# Altium PCB PCB_proj_module_1_1.PcbDoc (part 9 of 9)
Units mm, origin at the board's own origin, x right, y up, seen from the top; angles counter-clockwise.
Board outline 413 x 280 mm, 4 copper layers (Top Layer, Signal Layer 1, Signal Layer 2, Bottom Layer), stack 0.778 mm thick; 1054 components, 639 nets, 3181 pads, 673 vias.
Unrouted connection lines stored in the file: 570.
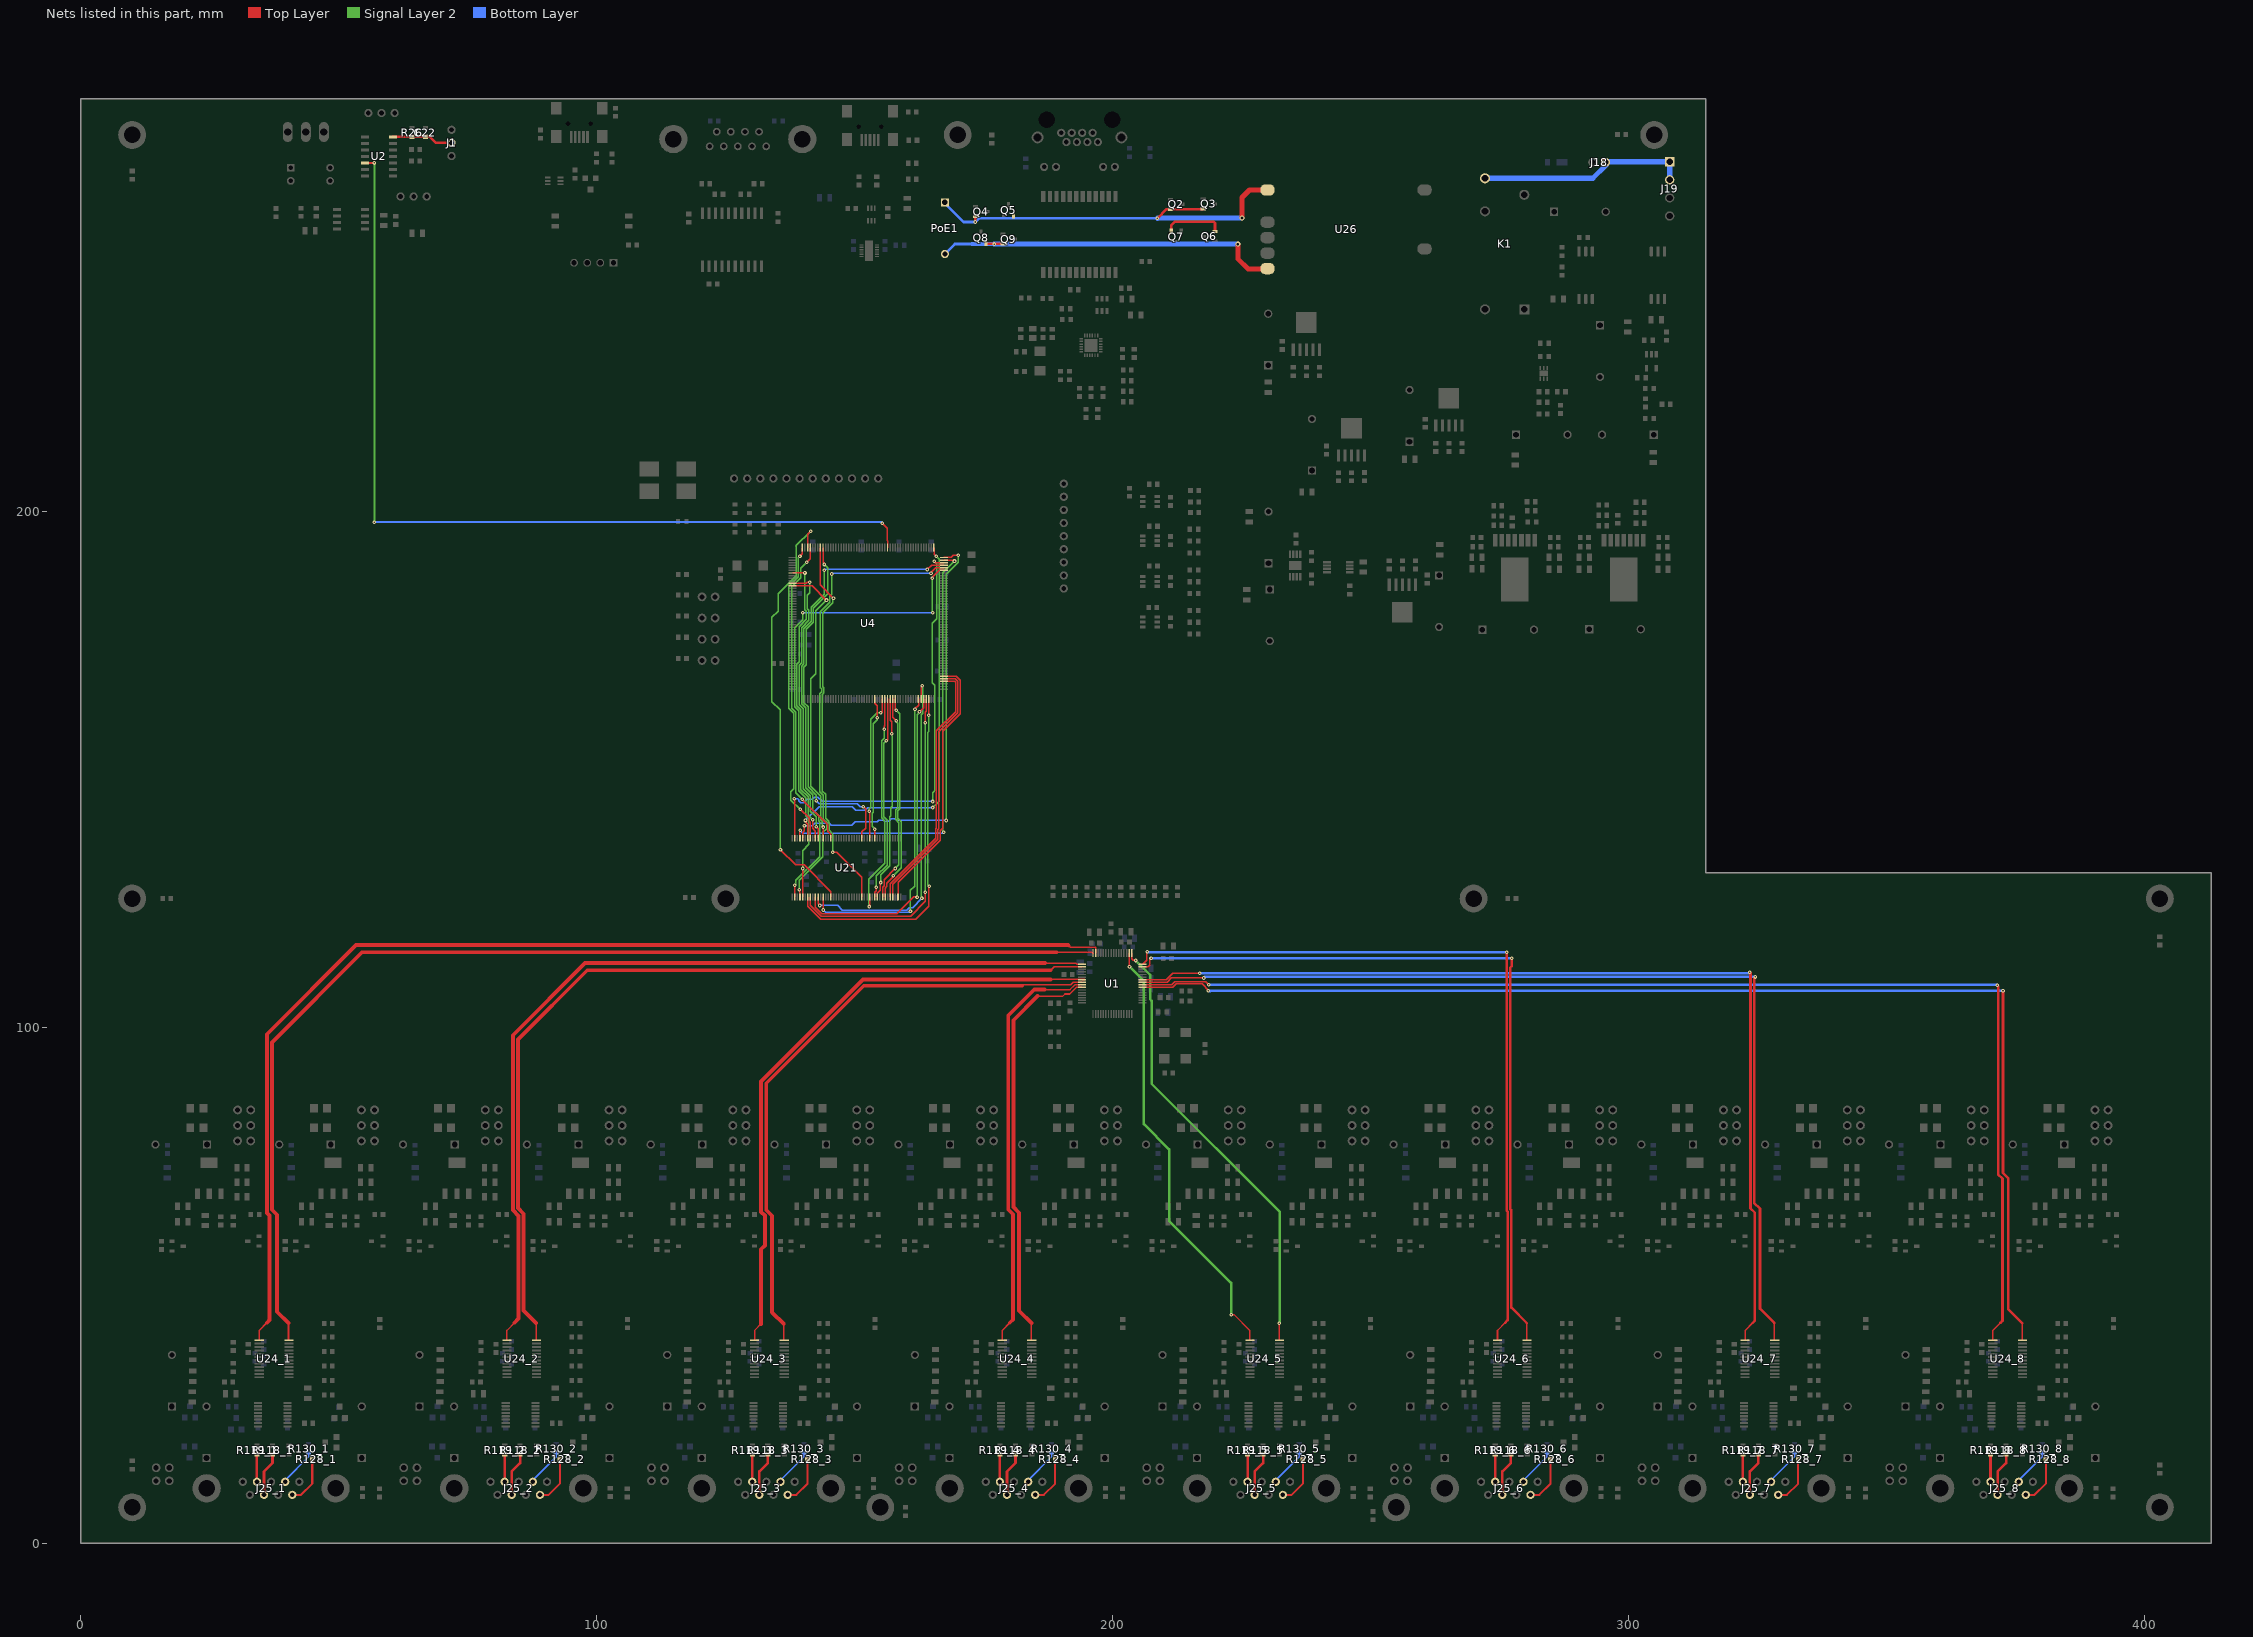
[diagram p10: the nets of this part, all layers, seen from the top]

## Via types
v1: diameter 0.7, hole 0.3, Top Layer to Bottom Layer, tented both sides, 659 vias
v2: diameter 1, hole 0.5, Top Layer to Bottom Layer, tented both sides, 12 vias
v3: diameter 0.66, hole 0.33, Top Layer to Bottom Layer, 2 vias

## Nets (pads, with @x,y where several pads share a name; then routed paths per layer and width w, separated by ;. In a path a pad name is that pad's centre, name@x,y a point inside that pad or via, vN(x,y) a via of type N, cw(c..) or ccw(c..) an arc to the next point about the centre after c; other vN are vias at no path point) (continued)
SDRAM_D6: U4.81 U21.11 | length 27.9
  Top Layer w0.254: U4.81@153.9,163.675 153.9,162.833 154.375,162.358 v1@154.375,160.025 ; v1(153.904,138.458) 153.934,138.428 U21.11@153.934,136.678 U21.11@153.957,136.701
  Signal Layer 2 w0.254: v1(153.904,138.458) 153.904,138.546 153.402,139.048 153.402,141.524 153.625,141.747 153.625,158.857 154.425,159.657 v1(154.425,160.025)
SDRAM_D7: U4.84 U21.13 | length 28.8
  Top Layer w0.254: v1(152.854,141.933) 152.934,141.853 U21.13@152.934,136.678 ; v1(155.1,161) 155.1,160.855 155.103,160.853 155.411,161.161 U4.84@155.411,163.681
  Signal Layer 2 w0.254: v1(152.854,141.933) 152.79,141.997 152.79,142.296 153.171,142.676 153.171,159.728 154.443,161 v1(155.1,161)
SDRAM_D8: U4.85 U21.74 | length 44
  Top Layer w0.254: v1(152.825,123.45) 152.934,123.559 U21.74@152.934,125.278 ; v1(155.754,157.784) 155.754,158.354 155.911,158.511 U4.85@155.911,163.681
  Signal Layer 2 w0.254: v1(152.825,123.45) 152.825,123.525 152.757,123.593 152.757,128.707 155.881,131.831 155.881,140.007 155.248,140.64 155.248,155.58 155.754,156.086 v1(155.754,157.784)
SDRAM_D9: U4.86 U21.76 | length 40.6
  Top Layer w0.254: U21.76@153.934,125.278 153.911,125.301 153.911,126.18 154.25,126.519 v1(154.25,127.2) ; v1(156.175,155.55) 156.419,155.794 156.419,157.492 156.431,157.504 156.431,158.065 156.419,158.076 156.419,160.295 156.431,160.307 156.431,163.661 U4.86@156.411,163.681
  Signal Layer 2 w0.254: v1(156.175,155.55) 155.702,155.077 155.702,140.828 156.335,140.195 156.335,131.476 154.25,129.392 v1(154.25,127.2) ; v1(154.25,127.2) 154.25,127.025 154.075,127.2 v1(154.25,127.2)
SDRAM_D10: U4.87 U21.77 | length 39.8
  Top Layer w0.254: U21.77@154.434,125.278 154.434,126.061 155.026,126.653 155.026,128.026 v1(155.1,128.1) ; U4.87@156.911,163.681 156.911,159.589 157.225,159.275 v1(157.225,156.975)
  Signal Layer 2 w0.254: v1(155.1,128.1) 155.1,129.599 156.86,131.359 156.86,140.832 157.056,141.028 157.056,142.607 157.306,142.857 157.306,156.894 v1(157.225,156.975)
SDRAM_D11: U4.88 U21.79 | length 40.5
  Top Layer w0.254: U21.79@155.434,125.278 155.434,126.418 155.48,126.464 155.48,127.197 155.777,127.494 155.777,128.677 v1(157.925,130.825) ; U4.88@157.411,163.681 157.402,163.672 157.402,160.123 158.075,159.45 v1(158.075,159.425)
  Signal Layer 2 w0.254: v1(157.925,130.825) 158.611,131.511 158.611,139.684 157.964,140.331 157.964,142.231 158.356,142.623 158.356,158.957 158.075,159.238 v1(158.075,159.425)
SDRAM_D12: U4.89 U21.80 | length 40.5
  Top Layer w0.254: U21.80@155.934,125.278 155.934,127.009 156.257,127.332 156.257,128.009 157.5,129.252 157.5,129.375 v1(157.475,129.4) ; U4.89@157.911,163.681 157.911,161.677 v1(158.079,161.509)
  Signal Layer 2 w0.254: v1(157.475,129.4) 159.065,130.99 159.065,139.872 158.418,140.519 158.418,142.043 158.81,142.435 158.81,160.778 v1(158.079,161.509)
SDRAM_D13: U4.108 U21.82 | length 49.2
  Top Layer w0.254: U21.82@156.934,125.278 156.934,127.902 165.715,136.683 165.715,138.507 165.877,138.669 165.877,157.519 169.592,161.234 169.592,166.924 169.41,167.106 U4.108@167.336,167.106
SDRAM_D14: U4.109 U21.83 | length 50
  Top Layer w0.254: U21.83@157.434,125.278 157.434,127.76 166.169,136.495 166.169,138.318 166.331,138.48 166.331,157.331 170.046,161.046 170.046,167.112 169.552,167.606 U4.109@167.336,167.606
SDRAM_D15: U4.110 U21.85 | length 50.5
  Top Layer w0.254: U21.85@158.434,125.278 158.434,128.117 166.623,136.306 166.623,138.13 167.123,138.63 167.123,157.423 170.5,160.8 170.5,167.3 169.694,168.106 U4.110@167.336,168.106
SDRAM_D16: U4.98 U21.56 | length 61.5
  Top Layer w0.254: U21.56@143.934,125.278 143.934,122.791 v1(143.95,122.775) ; v1(161.725,161.7) 161.725,161.8 162.411,162.486 U4.98@162.411,163.681
  Signal Layer 2 w0.254: v1(160.85,122.55) 160.85,126.6 161.671,127.421 161.671,161.646 v1(161.725,161.7)
  Bottom Layer w0.254: v1(143.95,122.775) 144.406,122.319 160.619,122.319 v1(160.85,122.55)
SDRAM_D17: U4.99 U21.54 | length 66.9
  Top Layer w0.254: U21.54@142.934,125.278 142.934,123.966 143.05,123.85 143.05,123.825 143.225,123.65 v1(143.25,123.65) ; U4.99@162.911,163.681 162.911,165.986 v1(163.15,166.225)
  Signal Layer 2 w0.254: v1(163.15,166.225) 163.277,166.098 163.277,160.92 162.95,160.593 162.95,125.407 v1@163.191,125.166
  Bottom Layer w0.254: v1(143.25,123.65) 146.743,123.65 147.62,122.773 160.116,122.773 160.57,123.227 161.252,123.227 v1(163.075,125.05)
SDRAM_D18: U4.100 U21.53 | length 62.6
  Top Layer w0.254: U21.53@142.434,125.278 142.434,123.308 143.644,122.098 158.198,122.098 161.45,125.35 162.05,125.35 v1(162.125,125.275) ; v1(162.6,161.2) 163.411,162.011 U4.100@163.411,163.681
  Signal Layer 2 w0.254: v1(162.125,125.275) 162.125,160.652 162.673,161.2 v1(162.6,161.2)
SDRAM_D19: U4.101 U21.51 | length 65.4
  Top Layer w0.254: U21.51@141.434,125.278 141.434,123.666 143.55,121.55 160.875,121.55 163.752,124.427 163.752,126.173 v1(163.725,126.2) ; v1(163.693,159.1) 163.693,161.118 163.911,161.336 U4.101@163.911,163.681
  Signal Layer 2 w0.254: v1(163.693,159.1) 163.693,126.407 v1@163.9,126.2
SDRAM_D20: U4.102 U21.50 | length 67.8
  Top Layer w0.254: U21.50@140.934,125.278 140.934,123.516 143.475,120.975 161.871,120.975 164.402,123.506 164.402,127.227 v1(164.525,127.35) ; v1(164.375,160.5) 164.411,160.536 U4.102@164.411,163.681
  Signal Layer 2 w0.254: v1(164.375,160.5) 164.375,157.332 164.223,157.18 164.223,127.652 v1(164.525,127.35)
SDRAM_D21: U4.151 U21.48 | length 92.9
  Top Layer w0.254: U21.48@139.934,125.278 139.934,126.356 139.98,126.402 v1(139.98,130.825) v1@139.98,130.98 ; v1(165.1,187.1) 164.9,187.1 166.406,188.606 U4.151@167.336,188.606
  Signal Layer 2 w0.254: v1(139.98,130.825) 139.98,134.28 141.18,135.48 141.18,140.42 140.552,141.048 140.552,144.53 139.175,145.907 139.175,161.4 138.386,162.189 138.386,177.443 140,179.057 v1(140,180.425) ; v1(165.1,187.1) 165.1,180.5 v1(165.2,180.4)
  Bottom Layer w0.254: v1(140,180.425) 165.175,180.425 v1(165.2,180.4)
SDRAM_D22: U4.152 U21.47 | length 89
  Top Layer w0.254: v1(139.303,126.683) 139.335,126.683 v1@139.434,126.584 ; U21.47@139.434,125.278 139.412,125.3 139.412,126.562 v1@139.434,126.584 ; v1@139.45,126.6 v1@139.434,126.584 ; v1(164.825,188.05) 164.825,188.167 165.764,189.106 U4.152@167.336,189.106
  Signal Layer 2 w0.254: v1(139.303,126.683) 139.303,128.549 143.884,133.13 143.884,137.817 144.63,138.563 144.63,139.382 144.593,139.419 144.593,139.76 143.939,140.414 143.939,145.003 143.29,145.652 143.29,164.733 143.627,165.07 143.627,165.63 143.375,165.882 143.375,180.575 145.25,182.45 145.25,183.632 145.6,183.982 v1(145.6,187.9)
  Bottom Layer w0.254: v1(145.6,187.9) 145.75,188.05 v1(164.825,188.05)
SDRAM_D23: U4.153 U21.45 | length 92.3
  Top Layer w0.254: v1(138.425,127.575) 138.434,127.566 U21.45@138.434,125.278 ; v1(164.1,188.775) 164.931,189.606 U4.153@167.336,189.606
  Signal Layer 2 w0.254: v1(138.425,127.575) 138.629,127.779 138.629,128.517 143.255,133.143 143.255,139.814 143.031,140.038 143.031,141.011 141.914,142.128 141.914,145.095 140.537,146.472 140.537,161.964 139.748,162.753 139.748,170.047 140.202,170.501 140.202,177.333 141.585,178.716 141.585,181.463 144.125,184.003 v1(144.125,188.665)
  Bottom Layer w0.254: v1(144.125,188.665) 144.235,188.775 v1(164.1,188.775)
SDRAM_D24: U4.154 U21.42 | length 85.9
  Top Layer w0.254: U21.42@138.434,136.678 v1@138.434,144.375 ; v1(165.425,190.4) 165.425,190.275 165.594,190.106 U4.154@167.336,190.106
  Signal Layer 2 w0.254: v1(165.2,143.8) 165.2,145.525 165.588,145.913 165.588,166.312 165.029,166.871 165.029,178.329 165.929,179.229 165.929,189.896 v1(165.425,190.4)
  Bottom Layer w0.254: v1(138.35,144.375) 139.043,144.375 139.198,144.22 139.198,143.97 139.595,143.573 140.155,143.573 140.782,144.2 141.86,144.2 142.321,144.661 142.882,144.661 143.721,143.823 164.923,143.823 165.2,144.1 v1(165.2,143.8)
SDRAM_D25: U4.155 U21.40 | length 85.4
  Top Layer w0.254: U21.40@139.434,136.678 139.434,138.184 v1(139.45,138.2) ; U4.155@167.336,190.606 169.184,190.606 v1(169.379,190.411)
  Signal Layer 2 w0.254: v1(167.3,137.85) 167.123,138.027 167.123,188.154 v1(169.379,190.411)
  Bottom Layer w0.254: v1(139.45,138.2) 140.019,137.631 167.081,137.631 v1(167.3,137.85)
SDRAM_D26: U4.156 U21.39 | length 86.5
  Top Layer w0.254: U21.39@139.934,136.678 139.934,137.727 140.303,138.096 v1(140.303,139.083) ; U4.156@167.336,191.106 168.706,191.106 169.1,191.5 v1(170.1,191.5)
  Signal Layer 2 w0.254: v1(167.8,140.125) 167.8,187.874 170.1,190.174 v1(170.1,191.5)
  Bottom Layer w0.254: v1(140.303,139.083) 141.821,139.083 142.298,139.56 145.094,139.56 145.448,139.206 146.009,139.206 146.022,139.22 149.515,139.22 150.185,139.889 151.236,139.889 151.238,139.888 153.337,139.888 153.339,139.889 154.39,139.889 154.715,140.214 155.673,140.214 155.888,140 156.67,140 157.13,140.46 157.834,140.46 158.17,140.125 v1(167.8,140.125) v1@167.85,140.125
SDRAM_D27: U4.157 U21.37 | length 81.2
  Top Layer w0.254: v1(140.503,140.133) 140.503,139.854 140.98,139.377 140.98,138.773 140.929,138.721 140.929,136.683 U21.37@140.934,136.678 ; U4.157@165.411,193.031 165.411,191.764 v1(165.825,191.35)
  Signal Layer 2 w0.254: v1(165.154,142.634) 166.383,143.862 166.383,190.792 v1(165.825,191.35)
  Bottom Layer w0.254: v1(140.503,140.133) 143.13,142.76 149.541,142.76 150.22,142.082 152.007,142.082 152.535,142.61 164.71,142.61 164.75,142.65 164.766,142.634 v1(165.154,142.634)
SDRAM_D28: U4.208 U21.36 | length 59.7
  Top Layer w0.254: v1(139.432,191.362) 139.911,191.841 U4.208@139.911,193.031 ; v1(139.5,142.325) 141.201,140.624 141.201,139.978 141.434,139.745 141.434,138.584 141.425,138.576 141.425,138.05 141.434,138.041 U21.36@141.434,136.678 U21.36@141.456,136.7
  Signal Layer 2 w0.254: v1(139.432,191.362) 139.129,191.059 139.129,187.337 137.275,185.483 137.275,161.843 138.202,160.916 138.202,146.234 137.673,145.705 137.673,144.095 139.443,142.325 v1(139.5,142.325)
SDRAM_D29: U4.7 U21.34 | length 56.2
  Top Layer w0.254: U4.7@137.986,188.106 v1@140.4,188.106 ; v1(141.878,140.258) 141.901,140.235 141.901,138.603 142.434,138.07 U21.34@142.434,136.678
  Signal Layer 2 w0.254: v1(140.4,188.1) 140.4,180.982 140.677,180.705 140.677,179.092 139.294,177.709 139.294,170.878 138.84,170.424 138.84,162.377 139.629,161.588 139.629,146.095 141.006,144.718 141.006,141.236 141.634,140.608 141.634,140.502 v1(141.878,140.258)
SDRAM_D30: U4.11 U21.33 | length 55.6
  Top Layer w0.254: U4.11@137.986,186.106 137.996,186.096 140.68,186.096 140.884,186.3 v1(141.3,186.3) ; v1(142.578,138.883) 142.934,138.527 U21.33@142.934,136.678
  Signal Layer 2 w0.254: v1(141.3,186.3) 141.3,184.275 140.854,183.829 140.854,181.17 141.131,180.893 141.131,178.904 139.748,177.521 139.748,170.69 139.294,170.236 139.294,162.565 140.083,161.776 140.083,146.284 141.46,144.907 141.46,141.94 142.577,140.823 v1@142.577,138.884
SDRAM_D31: U4.12 U21.31 | length 56.2
  Top Layer w0.254: U4.12@137.986,185.606 141.819,185.606 v1(144.573,182.852) ; U21.31@143.934,136.678 143.928,136.684 143.928,138.833 v1(143.953,138.858)
  Signal Layer 2 w0.254: v1(143.953,138.858) 143.71,139.101 143.71,140.001 143.485,140.226 143.485,144.815 141.5,146.8 141.5,167.6 142.493,168.593 142.493,180.772 v1(144.573,182.852)
SDRAM_DQM0: U4.200 U21.16 | length 68.5
  Top Layer w0.254: U4.200@143.911,193.031 143.911,190.209 144.175,189.945 v1(144.175,189.75) ; U21.16@151.434,136.678 151.434,137.939 152.155,138.661 152.155,142.357 v1(151.703,142.809)
  Signal Layer 2 w0.254: v1(142.602,143.984) 142.602,145.049 140.991,146.66 140.991,162.152 140.202,162.941 140.202,169.859 140.656,170.313 140.656,177.145 142.039,178.528 142.039,181.275 144.802,184.038 144.802,189.123 v1(144.175,189.75)
  Bottom Layer w0.254: v1(142.602,143.984) 143.217,143.369 150.531,143.369 151.091,142.809 v1(151.703,142.809)
SDRAM_DQM1: U4.201 U21.71 | length 73.5
  Top Layer w0.254: U4.201@143.411,193.031 143.411,189.726 143.375,189.69 143.375,185.789 v1(145.928,183.235) ; v1(145.8,134) 146.55,134 151.434,129.116 U21.71@151.434,125.278
  Signal Layer 2 w0.254: v1(145.8,134) 145.8,137.475 145.084,138.191 145.084,139.57 145.047,139.607 145.047,139.948 144.393,140.602 144.393,145.191 143.744,145.84 143.744,164.545 144.081,164.882 144.081,165.818 143.875,166.024 143.875,180.425 145.775,182.325 145.775,183.082 v1(145.928,183.235)
SDRAM_DQM2: U4.205 U21.28 | length 61
  Top Layer w0.254: v1(139.875,144.25) 139.916,144.209 139.916,144.184 144.826,139.274 144.826,138.048 145.411,137.463 145.411,136.701 U21.28@145.434,136.678 ; v1(140.761,190.16) 141.411,190.81 U4.205@141.411,193.031
  Signal Layer 2 w0.254: v1(139.875,144.25) 138.656,145.469 138.656,161.104 137.85,161.91 137.85,185.416 139.583,187.149 139.583,188.982 v1(140.761,190.16)
SDRAM_DQM3: U4.206 U21.59 | length 83.2
  Top Layer w0.254: v1(135.65,134.425) 138.573,131.502 140.26,131.502 145.434,126.328 U21.59@145.434,125.278 ; U4.206@140.911,193.031 140.911,195.611 v1(141.5,196.2)
  Signal Layer 2 w0.254: v1(135.65,134.425) 135.648,161.544 134.004,163.188 134.004,179.497 135.175,180.668 135.175,184.025 138.675,187.525 138.675,193.325 138.65,193.35 v1(141.5,196.2)
uC_off: U2.5 U4.175 | length 175.2
  Top Layer w0.254: v1(155.4,197.7) 156.361,196.739 156.361,194.38 156.4,194.341 U4.175@156.4,193.025
  Top Layer w0.4: U2.5@55.105,267.554 56.938,267.554 v1(56.95,267.566)
  Signal Layer 2 w0.4: v1(56.9,197.9) 56.95,197.95 v1(56.95,267.566)
  Bottom Layer w0.4: v1(56.9,197.9) 56.95,197.95 155.3,197.95 v1@155.4,197.85
VCC_Rad: C22.2 J1.2 R26.2 U2.14 | length 11.9
  Top Layer w0.5: U2.14@60.505,272.634 67.707,272.634 68.89,271.451 J1.2@71.9,271.451
VHall+_1: J25_1.7 R118_1.1 | length 8.6
  Top Layer w0.5: J25_1.7@35.552,9.416 35.552,13.952 37.2,15.6 37.2,17.1 R118_1.1@37,17.3
VHall+_2: J25_2.7 R118_2.1 | length 8.6
  Top Layer w0.5: J25_2.7@83.552,9.416 83.552,13.952 85.2,15.6 85.2,17.1 R118_2.1@85,17.3
VHall+_3: J25_3.7 R118_3.1 | length 8.6
  Top Layer w0.5: J25_3.7@131.552,9.416 131.552,13.952 133.2,15.6 133.2,17.1 R118_3.1@133,17.3
VHall+_4: J25_4.7 R118_4.1 | length 8.6
  Top Layer w0.5: J25_4.7@179.552,9.416 179.552,13.952 181.2,15.6 181.2,17.1 R118_4.1@181,17.3
VHall+_5: J25_5.7 R118_5.1 | length 8.6
  Top Layer w0.5: J25_5.7@227.552,9.416 227.552,13.952 229.2,15.6 229.2,17.1 R118_5.1@229,17.3
VHall+_6: J25_6.7 R118_6.1 | length 8.6
  Top Layer w0.5: J25_6.7@275.552,9.416 275.552,13.952 277.2,15.6 277.2,17.1 R118_6.1@277,17.3
VHall+_7: J25_7.7 R118_7.1 | length 8.6
  Top Layer w0.5: J25_7.7@323.552,9.416 323.552,13.952 325.2,15.6 325.2,17.1 R118_7.1@325,17.3
VHall+_8: J25_8.7 R118_8.1 | length 8.6
  Top Layer w0.5: J25_8.7@371.552,9.416 371.552,13.952 373.2,15.6 373.2,17.1 R118_8.1@373,17.3
VHall-_1: J25_1.2 R119_1.1 | length 5.4
  Top Layer w0.5: J25_1.2@34.182,11.956 34.182,17.282 R119_1.1@34.2,17.3
VHall-_2: J25_2.2 R119_2.1 | length 5.4
  Top Layer w0.5: J25_2.2@82.182,11.956 82.182,17.282 R119_2.1@82.2,17.3
VHall-_3: J25_3.2 R119_3.1 | length 5.4
  Top Layer w0.5: J25_3.2@130.182,11.956 130.182,17.282 R119_3.1@130.2,17.3
VHall-_4: J25_4.2 R119_4.1 | length 5.4
  Top Layer w0.5: J25_4.2@178.182,11.956 178.182,17.282 R119_4.1@178.2,17.3
VHall-_5: J25_5.2 R119_5.1 | length 5.4
  Top Layer w0.5: J25_5.2@226.182,11.956 226.182,17.282 R119_5.1@226.2,17.3
VHall-_6: J25_6.2 R119_6.1 | length 5.4
  Top Layer w0.5: J25_6.2@274.182,11.956 274.182,17.282 R119_6.1@274.2,17.3
VHall-_7: J25_7.2 R119_7.1 | length 5.4
  Top Layer w0.5: J25_7.2@322.182,11.956 322.182,17.282 R119_7.1@322.2,17.3
VHall-_8: J25_8.2 R119_8.1 | length 5.4
  Top Layer w0.5: J25_8.2@370.182,11.956 370.182,17.282 R119_8.1@370.2,17.3
Vin+MeanWell: J18.2 J19.1 J19.2 K1.3 | length 41
  Bottom Layer w1: K1.3@272.2,264.6 293.1,264.6 295.6,267.1 J18.2@295.6,267.7 295.7,267.8 J19.1@308,267.8 J19.2@308,264.3
Vin+POE: PoE1.1 Q2.2 Q3.2 Q4.2 Q5.2 U26.1 | length 79.9
  Top Layer w0.5: v1(208.7,256.825) 210.475,258.6 Q2.2@211.25,258.6 217.525,258.6 Q3.2@217.6,258.675
  Top Layer w0.508: v1(173.425,256.126) 173.429,256.13 Q4.2@173.429,257.208
  Top Layer w1: v2(225.1,256.9) 225.1,260.9 226.534,262.334 U26.1@230.049,262.334
  Bottom Layer w0.5: v1(173.425,256.126) 174.124,256.825 v1(208.7,256.825)
  Bottom Layer w0.508: PoE1.1@167.525,259.926 167.525,259.726 171.125,256.126 v1(173.425,256.126)
  Bottom Layer w1: v1(208.7,256.825) 208.775,256.9 v2(225.1,256.9)
Vin-POE: PoE1.2 Q6.2 Q7.2 Q8.2 Q9.2 U26.5 | length 81.9
  Top Layer w0.508: Q8.2@175.479,251.978 175.583,251.874 Q9.2@178.763,251.874 ; Q7.2@211.425,254.375 211.425,255.5 212.125,256.2 219.575,256.2 219.875,255.9 Q6.2@219.875,254.275
  Top Layer w1: v2(224.3,251.851) 224.3,249 226.3,247 U26.5@230,247
  Bottom Layer w0.508: PoE1.2@167.525,249.926 169.45,251.851 172.7,251.851
  Bottom Layer w0.7: 172.7,251.851 v1(177.1,251.851)
  Bottom Layer w1: v1(177.1,251.851) v2(224.3,251.851)
VinM_planar1: U1.63 U24_1.1 | length 229.5
  Top Layer w0.3: U24_1.1@34.63,39.375 34.63,41.3 36.1,42.77 ; 191.6,115.8 191.871,115.529 196.718,115.529 196.718,114.622 196.728,114.611 U1.63@196.728,114.404
  Top Layer w0.5: 191.4,116 191.6,115.8
  Top Layer w0.75: 36.1,42.77 36.625,43.295 36.625,63.542 36.1,64.067 36.1,98.7 53.4,116 191.4,116
VinM_planar2: U1.1 U24_2.1 | length 176.7
  Top Layer w0.3: U24_2.1@82.63,39.375 82.63,41.3 84.1,42.77 ; 186.9,112.5 192.917,112.5 193.166,112.251 193.178,112.264 194.098,112.264 U1.1@194.098,112.274
  Top Layer w0.75: 84.1,42.77 84.9,43.57 84.9,63.5 83.8,64.6 83.8,98.5 97.8,112.5 186.9,112.5
VinM_planar3: U1.7 U24_3.1 | length 122.7
  Top Layer w0.254: 188,109.3 188.007,109.307 194.593,109.307 194.626,109.274 U1.7@194.098,109.274
  Top Layer w0.3: U24_3.1@130.63,39.375 130.63,41.3 131.9,42.57
  Top Layer w0.75: 131.9,42.57 131.9,57.033 132.625,57.758 132.625,63.542 131.9,64.267 131.9,89.544 151.656,109.3 188,109.3
VinM_planar4: U1.9 U24_4.1 | length 80.6
  Top Layer w0.3: U24_4.1@178.63,39.375 178.63,41.3 180.1,42.77 ; 186.85,107.35 191.782,107.35 192.716,108.284 U1.9@193.744,108.284
  Top Layer w0.75: 180.1,42.77 180.7,43.37 180.7,63.8 179.8,64.7 179.8,102.3 184.85,107.35 186.85,107.35
VinM_planar5: U1.50 U24_5.1 | length 85.1
  Top Layer w0.254: U1.50@203.228,114.404 203.228,111.872 v1(203.3,111.8)
  Top Layer w0.3: v1(223,44.3) 223.63,44.3 226.63,41.3 U24_5.1@226.63,39.375
  Signal Layer 2 w0.5: v1(203.3,111.8) 206.1,109 206.1,81.3 211,76.4 211,62.5 223,50.5 v1(223,44.3)
VinM_planar6: U1.48 U24_6.1 | length 148.5
  Top Layer w0.254: U1.48@205.9,112.275 206.675,113.05 v1@206.675,114.675
  Top Layer w0.3: U24_6.1@274.63,39.375 274.63,41.3 276.1,42.77
  Top Layer w0.5: 276.1,42.77 276.6,43.27 276.6,64.3 276.4,64.5 v1(276.4,114.6)
  Bottom Layer w0.5: v1(206.75,114.675) 206.825,114.6 v1(276.4,114.6)
VinM_planar7: U1.42 U24_7.1 | length 190.7
  Top Layer w0.254: U1.42@205.858,109.274 210.432,109.274 211.658,110.5 v1(216.9,110.5)
  Top Layer w0.3: U24_7.1@322.63,39.375 322.63,41.3 324.1,42.77
  Top Layer w0.5: v1(323.5,110.7) 323.67,110.53 323.67,64.93 324.5,64.1 324.5,43.17 324.1,42.77
  Bottom Layer w0.5: v1(216.9,110.5) 323.2,110.5 323.4,110.7 v1(323.5,110.7)
VinM_planar8: U1.40 U24_8.1 | length 236.2
  Top Layer w0.254: U1.40@205.858,108.274 211.474,108.274 212.1,108.9 218.05,108.9 v1(218.675,108.275)
  Top Layer w0.3: U24_8.1@370.63,39.375 370.63,41.3 372.1,42.77
  Top Layer w0.5: v1(371.5,108.2) 371.67,108.03 371.67,71.53 372.5,70.7 372.5,43.17 372.1,42.77
  Bottom Layer w0.5: v1(218.675,108.275) 371.425,108.275 v1(371.5,108.2)
VinP_planar1: U1.64 U24_1.24 | length 225.5
  Top Layer w0.3: U24_1.24@40.3,39.4 40.3,42.7 ; 189.2,114.6 196.032,114.6 U1.64@196.228,114.404
  Top Layer w0.75: 40.3,42.7 38.1,44.9 38.1,63.7 37.125,64.675 37.125,97.125 54.6,114.6 189.2,114.6
VinP_planar2: U1.2 U24_2.24 | length 174.9
  Top Layer w0.254: 188,111.1 188.674,111.774 U1.2@194.098,111.774
  Top Layer w0.3: U24_2.24@88.3,39.4 88.3,42.7
  Top Layer w0.75: 88.3,42.7 85.85,45.15 85.85,63.893 84.75,64.993 84.75,97.65 98.2,111.1 188,111.1
VinP_planar3: U1.8 U24_3.24 | length 120.4
  Top Layer w0.3: U24_3.24@136.3,39.4 136.3,42.5 ; 182.469,108.3 191.917,108.3 192.401,108.784 194.088,108.784 U1.8@194.098,108.774
  Top Layer w0.75: 136.3,42.5 134,44.8 134,63.51 132.9,64.61 132.9,89.2 151.8,108.1 182.469,108.1
VinP_planar4: U1.10 U24_4.24 | length 79.4
  Top Layer w0.3: U24_4.24@184.3,39.4 184.3,42.7 ; 185.5,106.1 190.4,106.1 190.8,106.5 191.718,106.5 192.992,107.774 U1.10@194.098,107.774
  Top Layer w0.75: 184.3,42.7 181.9,45.1 181.9,64.1 180.8,65.2 180.8,101.4 185.5,106.1
VinP_planar5: U1.49 U24_5.24 | length 87.2
  Top Layer w0.254: U1.49@203.728,114.404 203.728,113.297 204.025,113 v1(204.5,113)
  Top Layer w0.3: U24_5.24@232.3,39.4 v1(232.3,42.7)
  Signal Layer 2 w0.5: v1(204.5,113) 207.325,110.174 207.325,105.443 207.6,105.168 207.6,89.1 232.4,64.3 232.4,42.8 v1(232.3,42.7)
VinP_planar6: U1.47 U24_6.24 | length 148.4
  Top Layer w0.254: U1.47@205.858,111.774 206.922,111.774 207.228,112.08 207.228,113.35 207.303,113.425 v1(207.475,113.425)
  Top Layer w0.3: U24_6.24@280.3,39.4 280.3,42.7
  Top Layer w0.5: v1(277.4,113.4) 277.4,111.9 277.1,111.6 277.1,64.79 277.3,64.59 277.3,45.7 280.3,42.7
  Bottom Layer w0.5: v1@207.475,113.4 v1(277.4,113.4)
VinP_planar7: U1.41 U24_7.24 | length 191.3
  Top Layer w0.254: U1.41@205.858,108.774 210.574,108.774 211.4,109.6 v1(217.7,109.6)
  Top Layer w0.3: U24_7.24@328.3,39.4 328.3,42.7
  Top Layer w0.5: v1(324.6,109.8) 324.37,109.57 324.37,66.03 325.5,64.9 325.5,45.5 328.3,42.7
  Bottom Layer w0.5: v1(217.7,109.6) 217.9,109.8 v1(324.6,109.8)
VinP_planar8: U1.39 U24_8.24 | length 237
  Top Layer w0.254: U1.39@205.858,107.774 211.674,107.774 212.346,108.446 217.354,108.446 218.638,107.162 v1(218.6,107.125)
  Top Layer w0.3: U24_8.24@376.3,39.4 376.3,42.7
  Top Layer w0.5: v1(372.6,107.1) 372.6,71.8 373.6,70.8 373.6,45.4 376.3,42.7
  Bottom Layer w0.5: v1(218.6,107.125) 218.675,107.2 218.875,107 218.975,107.1 v1(372.6,107.1)
VPt+_1: J25_1.9 R128_1.1 | length 9.5
  Top Layer w0.4: J25_1.9@41.032,9.416 42.716,9.416 44.9,11.6 R128_1.1@44.9,16.3
VPt+_2: J25_2.9 R128_2.1 | length 9.5
  Top Layer w0.4: J25_2.9@89.032,9.416 90.716,9.416 92.9,11.6 R128_2.1@92.9,16.3
VPt+_3: J25_3.9 R128_3.1 | length 9.5
  Top Layer w0.4: J25_3.9@137.032,9.416 138.716,9.416 140.9,11.6 R128_3.1@140.9,16.3
VPt+_4: J25_4.9 R128_4.1 | length 9.5
  Top Layer w0.4: J25_4.9@185.032,9.416 186.716,9.416 188.9,11.6 R128_4.1@188.9,16.3
VPt+_5: J25_5.9 R128_5.1 | length 9.5
  Top Layer w0.4: J25_5.9@233.032,9.416 234.716,9.416 236.9,11.6 R128_5.1@236.9,16.3
VPt+_6: J25_6.9 R128_6.1 | length 9.5
  Top Layer w0.4: J25_6.9@281.032,9.416 282.716,9.416 284.9,11.6 R128_6.1@284.9,16.3
VPt+_7: J25_7.9 R128_7.1 | length 9.5
  Top Layer w0.4: J25_7.9@329.032,9.416 330.716,9.416 332.9,11.6 R128_7.1@332.9,16.3
VPt+_8: J25_8.9 R128_8.1 | length 9.5
  Top Layer w0.4: J25_8.9@377.032,9.416 378.716,9.416 380.9,11.6 R128_8.1@380.9,16.3
VPt-_1: J25_1.4 R130_1.1 | length 7.5
  Bottom Layer w0.3: J25_1.4@39.662,11.956 39.662,12.262 44.2,16.8 R130_1.1@44.2,17.6
VPt-_2: J25_2.4 R130_2.1 | length 7.5
  Bottom Layer w0.3: J25_2.4@87.662,11.956 87.662,12.262 92.2,16.8 R130_2.1@92.2,17.6
VPt-_3: J25_3.4 R130_3.1 | length 7.5
  Bottom Layer w0.3: J25_3.4@135.662,11.956 135.662,12.262 140.2,16.8 R130_3.1@140.2,17.6
VPt-_4: J25_4.4 R130_4.1 | length 7.5
  Bottom Layer w0.3: J25_4.4@183.662,11.956 183.662,12.262 188.2,16.8 R130_4.1@188.2,17.6
VPt-_5: J25_5.4 R130_5.1 | length 7.5
  Bottom Layer w0.3: J25_5.4@231.662,11.956 231.662,12.262 236.2,16.8 R130_5.1@236.2,17.6
VPt-_6: J25_6.4 R130_6.1 | length 7.5
  Bottom Layer w0.3: J25_6.4@279.662,11.956 279.662,12.262 284.2,16.8 R130_6.1@284.2,17.6
VPt-_7: J25_7.4 R130_7.1 | length 7.5
  Bottom Layer w0.3: J25_7.4@327.662,11.956 327.662,12.262 332.2,16.8 R130_7.1@332.2,17.6
VPt-_8: J25_8.4 R130_8.1 | length 7.5
  Bottom Layer w0.3: J25_8.4@375.662,11.956 375.662,12.262 380.2,16.8 R130_8.1@380.2,17.6
pads on no net: DD1.1 DD2.6 DD2.8 DD2.11 J16.1 J16.4 J16.6 J16.7 J16.8 J16.9 J17.M1 J17.M2 J25_1.5 J25_1.11 J25_2.5 J25_2.11 J25_3.5 J25_3.11 J25_4.5 J25_4.11 J25_5.5 J25_5.11 J25_6.5 J25_6.11 J25_7.5 J25_7.11 J25_8.5 J25_8.11 J28.4 J28.MTG1 J28.MTG2 J30.MTG1 J30.MTG2 T1.5 T1.6 T1.11 T1.12 U1.11 U1.12 U1.13 U1.14 U1.15 U2.13 U4.5 U4.10 U4.31 U4.32 U4.33 U4.37 U4.43 U4.47 U4.48 U4.49 U4.50 U4.53 U4.54 U4.55 U4.61 U4.62 U4.63 U4.96 U4.97 U4.104 U4.105 U4.106 U4.107 U4.111 U4.112 U4.113 U4.129 U4.130 U4.133 U4.134 U4.143 U4.160 U4.178 U4.179 U4.181 U4.197 U4.198 U4.199 U8.3 U12.14 U12.15 U12.16 U12.17 U12.26 U12.27 U17.5 U21.14 U21.30 U21.57 U21.69 U21.70 U21.73 U24_1.5 U24_1.6 U24_2.5 U24_2.6 U24_3.5 U24_3.6 U24_4.5 U24_4.6 U24_5.5 U24_5.6 U24_6.5 U24_6.6 U24_7.5 U24_7.6 U24_8.5 U24_8.6 U26.2 U26.3 U26.4

## Polygon pours and split planes (outlines as drawn)
GND on Top Layer "Top Layer-GND" (solid, pour order 12): 1,1 1,279 314,279 314,129 412,129 412,1
no net on Top Layer "Top Layer-No Net" (solid, pour order 10): 87.676,153.416
no net on Mechanical 13 (solid): -7.32,0
GND on Bottom Layer "Bottom Layer-GND" (solid, pour order 14): 1,1 1,279 314,279 314,129 412,129 412,1
5V8 on Signal Layer 1 (solid, pour order 16): 1,279 314,279 314,129 412,129 412,53.3 1,53.3

## Silkscreen, mask and mechanical layers (free items; w line width, h text height)
Top Overlay:
  circle w0.254: c353.87,17.33 r0.254
  circle w0.254: c352.6,17.33 r0.254
  circle w0.254: c352.6,18.6 r0.254
  circle w0.254: c353.87,18.6 r0.254
  circle w0.254: c351,18.6 r0.254
  circle w0.254: c351,17.33 r0.254
  circle w0.254: c349.73,18.6 r0.254
  circle w0.254: c349.73,17.33 r0.254
  circle w0.254: c305.77,17.43 r0.254
  circle w0.254: c304.5,17.43 r0.254
  circle w0.254: c304.5,18.7 r0.254
  circle w0.254: c305.77,18.7 r0.254
  circle w0.254: c302.9,18.7 r0.254
  circle w0.254: c302.9,17.43 r0.254
  circle w0.254: c301.63,18.7 r0.254
  circle w0.254: c301.63,17.43 r0.254
  circle w0.254: c257.87,17.33 r0.254
  circle w0.254: c256.6,17.33 r0.254
  circle w0.254: c256.6,18.6 r0.254
  circle w0.254: c257.87,18.6 r0.254
  circle w0.254: c255,18.6 r0.254
  circle w0.254: c255,17.33 r0.254
  circle w0.254: c253.73,18.6 r0.254
  circle w0.254: c253.73,17.33 r0.254
  circle w0.254: c209.87,17.43 r0.254
  circle w0.254: c208.6,17.43 r0.254
  circle w0.254: c208.6,18.7 r0.254
  circle w0.254: c209.87,18.7 r0.254
  circle w0.254: c207,18.7 r0.254
  circle w0.254: c207,17.43 r0.254
  circle w0.254: c205.73,18.7 r0.254
  circle w0.254: c205.73,17.43 r0.254
  circle w0.254: c161.87,17.43 r0.254
  circle w0.254: c160.6,17.43 r0.254
  circle w0.254: c160.6,18.7 r0.254
  circle w0.254: c161.87,18.7 r0.254
  circle w0.254: c159,18.7 r0.254
  circle w0.254: c159,17.43 r0.254
  circle w0.254: c157.73,18.7 r0.254
  circle w0.254: c157.73,17.43 r0.254
  circle w0.254: c113.87,17.53 r0.254
  circle w0.254: c112.6,17.53 r0.254
  circle w0.254: c112.6,18.8 r0.254
  circle w0.254: c113.87,18.8 r0.254
  circle w0.254: c111,18.8 r0.254
  circle w0.254: c111,17.53 r0.254
  circle w0.254: c109.73,18.8 r0.254
  circle w0.254: c109.73,17.53 r0.254
  circle w0.254: c65.87,17.53 r0.254
  circle w0.254: c64.6,17.53 r0.254
  circle w0.254: c64.6,18.8 r0.254
  circle w0.254: c65.87,18.8 r0.254
  circle w0.254: c63,18.8 r0.254
  circle w0.254: c63,17.53 r0.254
  circle w0.254: c61.73,18.8 r0.254
  circle w0.254: c61.73,17.53 r0.254
  circle w0.254: c13.83,17.43 r0.254
  circle w0.254: c13.83,18.7 r0.254
  circle w0.254: c15.1,17.43 r0.254
  circle w0.254: c15.1,18.7 r0.254
  circle w0.254: c17.97,18.7 r0.254
  circle w0.254: c16.7,18.7 r0.254
  circle w0.254: c16.7,17.43 r0.254
  circle w0.254: c17.97,17.43 r0.254
  lines w0.254: 13.83,17.43 13.83,18.7 ; 15.1,17.43 15.1,18.7 ; 16.7,17.43 17.97,17.43 ; 61.73,17.53 61.73,18.8 ; 63,17.53 63,18.8 ; 64.6,17.53 65.87,17.53 ; 109.73,17.53 109.73,18.8 ; 111,17.53 111,18.8 ; 112.6,17.53 113.87,17.53 ; 157.73,17.43 157.73,18.7 ; 159,17.43 159,18.7 ; 160.6,17.43 161.87,17.43 ; 205.73,17.43 205.73,18.7 ; 207,17.43 207,18.7 ; 208.6,17.43 209.87,17.43 ; 253.73,17.33 253.73,18.6 ; 255,17.33 255,18.6 ; 256.6,17.33 257.87,17.33 ; 301.63,17.43 301.63,18.7 ; 302.9,17.43 302.9,18.7 ; 304.5,17.43 305.77,17.43 ; 349.73,17.33 349.73,18.6 ; 351,17.33 351,18.6 ; 352.6,17.33 353.87,17.33
  text "USB" at 87.1,271.7 h1.52 r90
  text "UART" at 111.5,271 h1.52 r90
  text "UART" at 147.3,271 h1.52 r90
  text "12V MW" at 304.2,269.1 h1.14 r270
  text "GND" at 304.3,260.4 h1.14 r270
  text "GND" at 96.228,250.396 h1.14 r90
  text "SWCLK" at 98.768,250.271 h1.14 r90
  text "SWDIO" at 101.308,250.096 h1.14 r90
  text "3V3" at 103.848,250.071 h1.14 r90
  text "2 src" at 61.7,24.9 h1.14 r270
  text "2 src" at 109.7,24.9 h1.14 r270
  text "2 src" at 13.8,24.8 h1.14 r270
  text "1 src" at 64.5,24.8 h1.14 r270
  text "1 src" at 112.5,24.8 h1.14 r270
  text "2 src" at 157.7,24.8 h1.14 r270
  text "2 src" at 205.7,24.8 h1.14 r270
  text "2 src" at 301.6,24.8 h1.14 r270
  text "1 src" at 16.6,24.7 h1.14 r270
  text "1 src" at 160.5,24.7 h1.14 r270
  text "1 src" at 208.5,24.7 h1.14 r270
  text "2 src" at 253.7,24.7 h1.14 r270
  text "1 src" at 304.4,24.7 h1.14 r270
  text "2 src" at 349.7,24.7 h1.14 r270
  text "1 src" at 256.5,24.6 h1.14 r270
  text "1 src" at 352.5,24.6 h1.14 r270
Top Solder:
Mechanical 3:
  the board outline again, w0.2

## Text inside footprints (layer, text, board x,y; h text height)
D5: Mechanical 14 "*" at 287.562,267.065 h1.27
J16: Top Overlay "9" at 133.145,273.129 h1.2; Top Overlay "1" at 120.045,270.629 h1.2; Top Overlay "5" at 134.245,270.629 h1.2; Top Overlay "6" at 121.02,273.129 h1.2; Mechanical 14 "6" at 121.02,273.129 h1.2; Mechanical 14 "5" at 134.245,270.629 h1.2; Mechanical 14 "1" at 120.045,270.629 h1.2; Mechanical 14 "9" at 133.145,273.129 h1.2
J17: Top Overlay "1" at 190.495,275.239 h1.2; Mechanical 14 "1" at 190.495,275.239 h1.2
J25_1: Top Overlay "9" at 44.669,10.178 h1.5 r180; Top Overlay "1" at 30.191,12.718 h1.5 r180; Top Overlay "5" at 44.669,12.718 h1.5 r180; Top Overlay "6" at 30.318,10.051 h1.5 r180
J25_2: Top Overlay "9" at 92.669,10.178 h1.5 r180; Top Overlay "1" at 78.191,12.718 h1.5 r180; Top Overlay "5" at 92.669,12.718 h1.5 r180; Top Overlay "6" at 78.318,10.051 h1.5 r180
J25_3: Top Overlay "9" at 140.669,10.178 h1.5 r180; Top Overlay "1" at 126.191,12.718 h1.5 r180; Top Overlay "5" at 140.669,12.718 h1.5 r180; Top Overlay "6" at 126.318,10.051 h1.5 r180
J25_4: Top Overlay "9" at 188.669,10.178 h1.5 r180; Top Overlay "1" at 174.191,12.718 h1.5 r180; Top Overlay "5" at 188.669,12.718 h1.5 r180; Top Overlay "6" at 174.318,10.051 h1.5 r180
J25_5: Top Overlay "9" at 236.669,10.178 h1.5 r180; Top Overlay "1" at 222.191,12.718 h1.5 r180; Top Overlay "5" at 236.669,12.718 h1.5 r180; Top Overlay "6" at 222.318,10.051 h1.5 r180
J25_6: Top Overlay "9" at 284.669,10.178 h1.5 r180; Top Overlay "1" at 270.191,12.718 h1.5 r180; Top Overlay "5" at 284.669,12.718 h1.5 r180; Top Overlay "6" at 270.318,10.051 h1.5 r180
J25_7: Top Overlay "9" at 332.669,10.178 h1.5 r180; Top Overlay "1" at 318.191,12.718 h1.5 r180; Top Overlay "5" at 332.669,12.718 h1.5 r180; Top Overlay "6" at 318.318,10.051 h1.5 r180
J25_8: Top Overlay "9" at 380.669,10.178 h1.5 r180; Top Overlay "1" at 366.191,12.718 h1.5 r180; Top Overlay "5" at 380.669,12.718 h1.5 r180; Top Overlay "6" at 366.318,10.051 h1.5 r180
U1: Mechanical 14 "*" at 194.936,111.889 h1.27
U24_1: Mechanical 14 "*" at 35.316,38.403 h1.27
U24_2: Mechanical 14 "*" at 83.316,38.403 h1.27
U24_3: Mechanical 14 "*" at 131.316,38.403 h1.27
U24_4: Mechanical 14 "*" at 179.316,38.403 h1.27
U24_5: Mechanical 14 "*" at 227.316,38.403 h1.27
U24_6: Mechanical 14 "*" at 275.316,38.403 h1.27
U24_7: Mechanical 14 "*" at 323.316,38.403 h1.27
U24_8: Mechanical 14 "*" at 371.316,38.403 h1.27